# Altium PCB PCB.PcbDoc
Units mm, origin at the board's own origin, x right, y up, seen from the top; angles counter-clockwise.
Board outline 66.42 x 42.04 mm, 2 copper layers (Top Layer, Bottom Layer); 37 components, 31 nets, 242 pads, 75 vias.
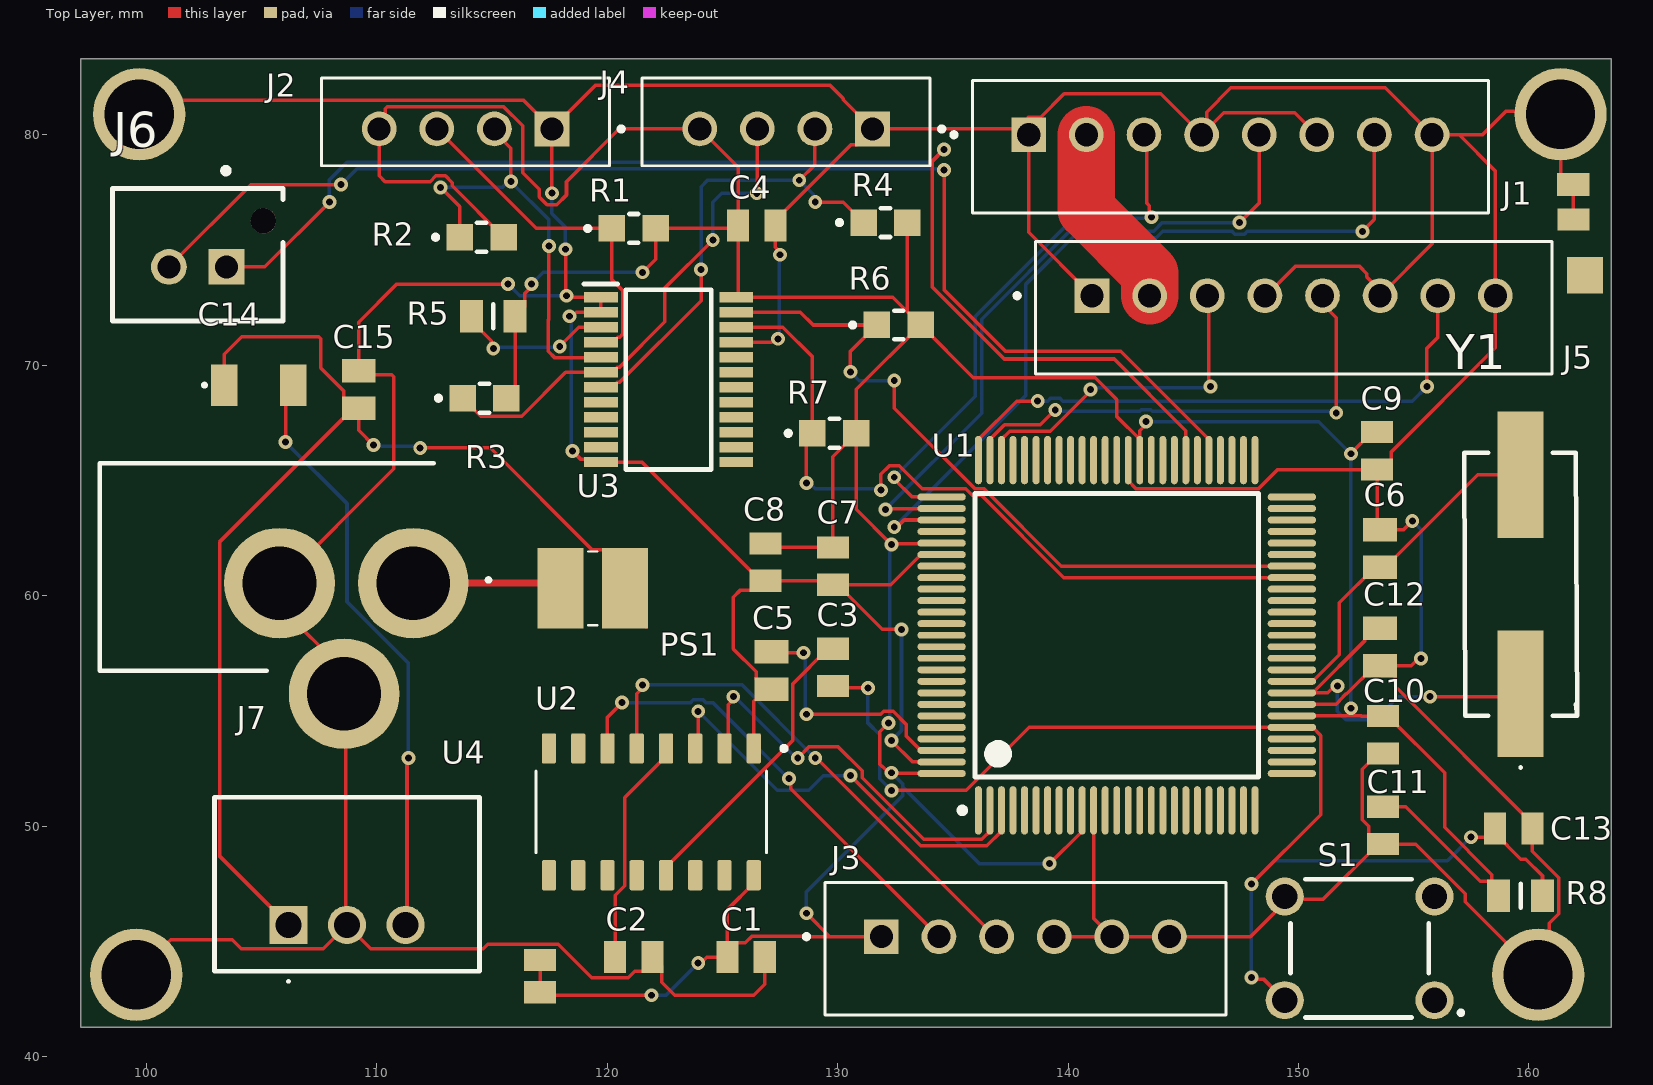
[diagram p0: Top Layer view]
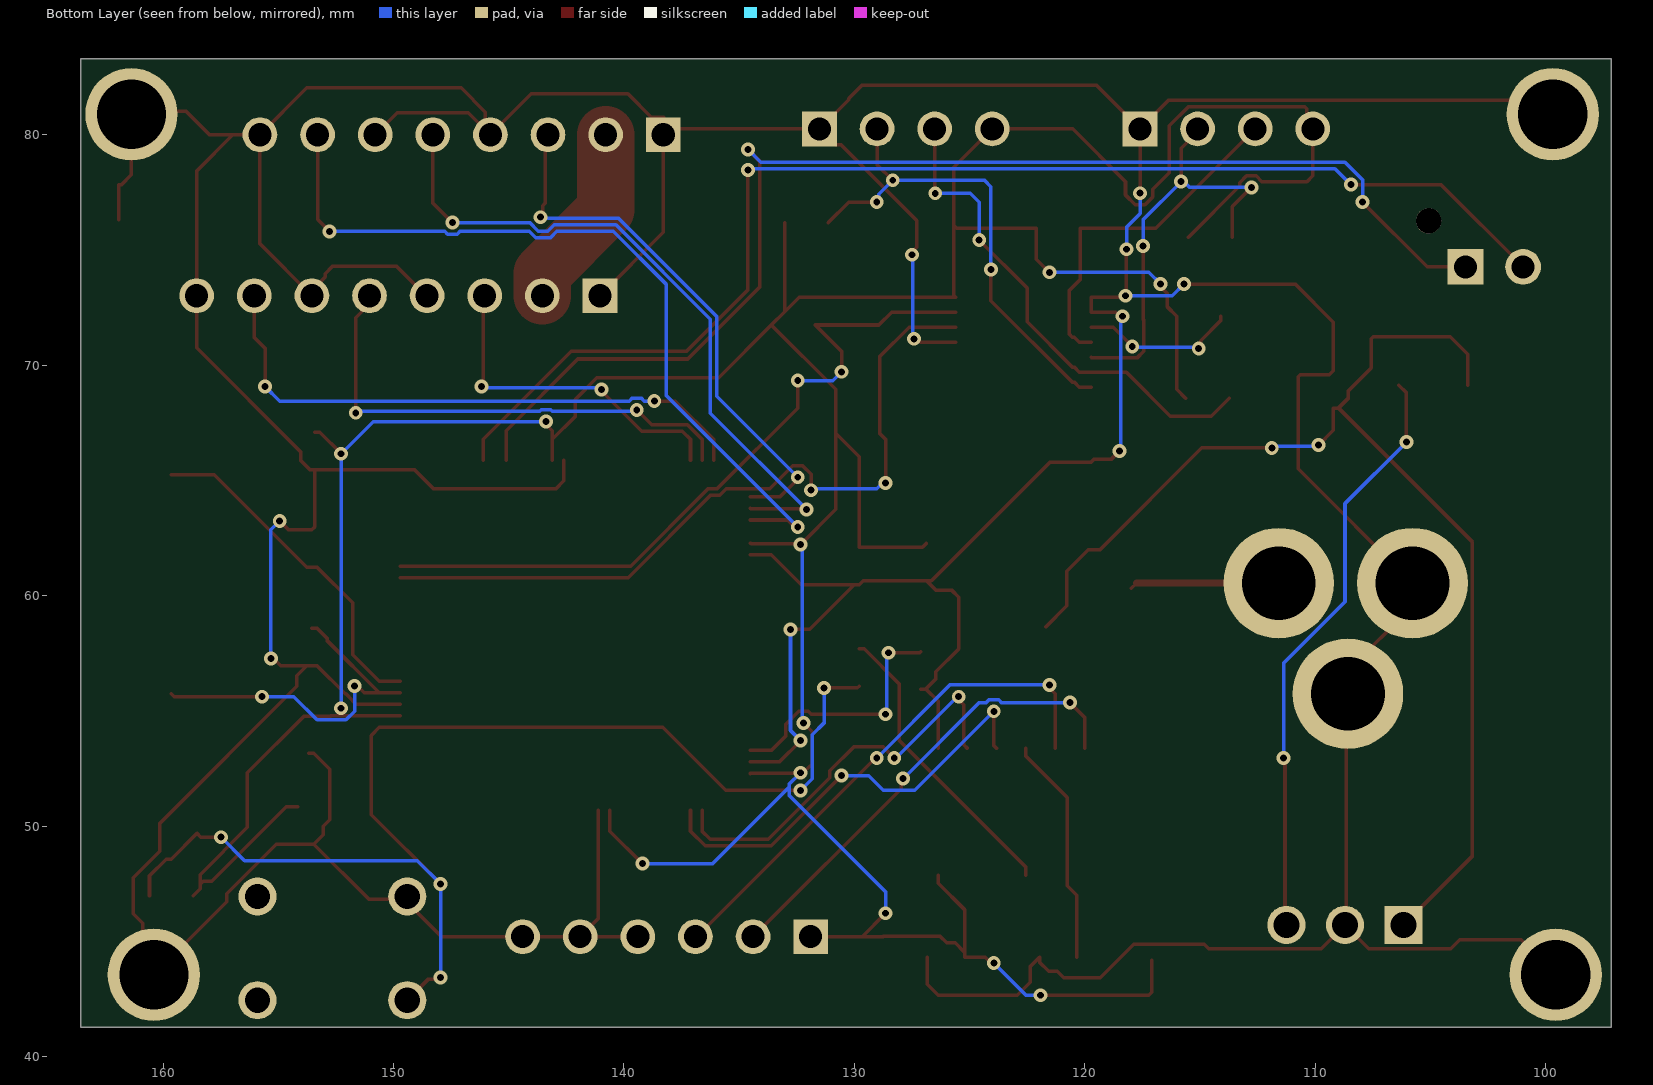
[diagram p1: Bottom Layer view, seen from below]
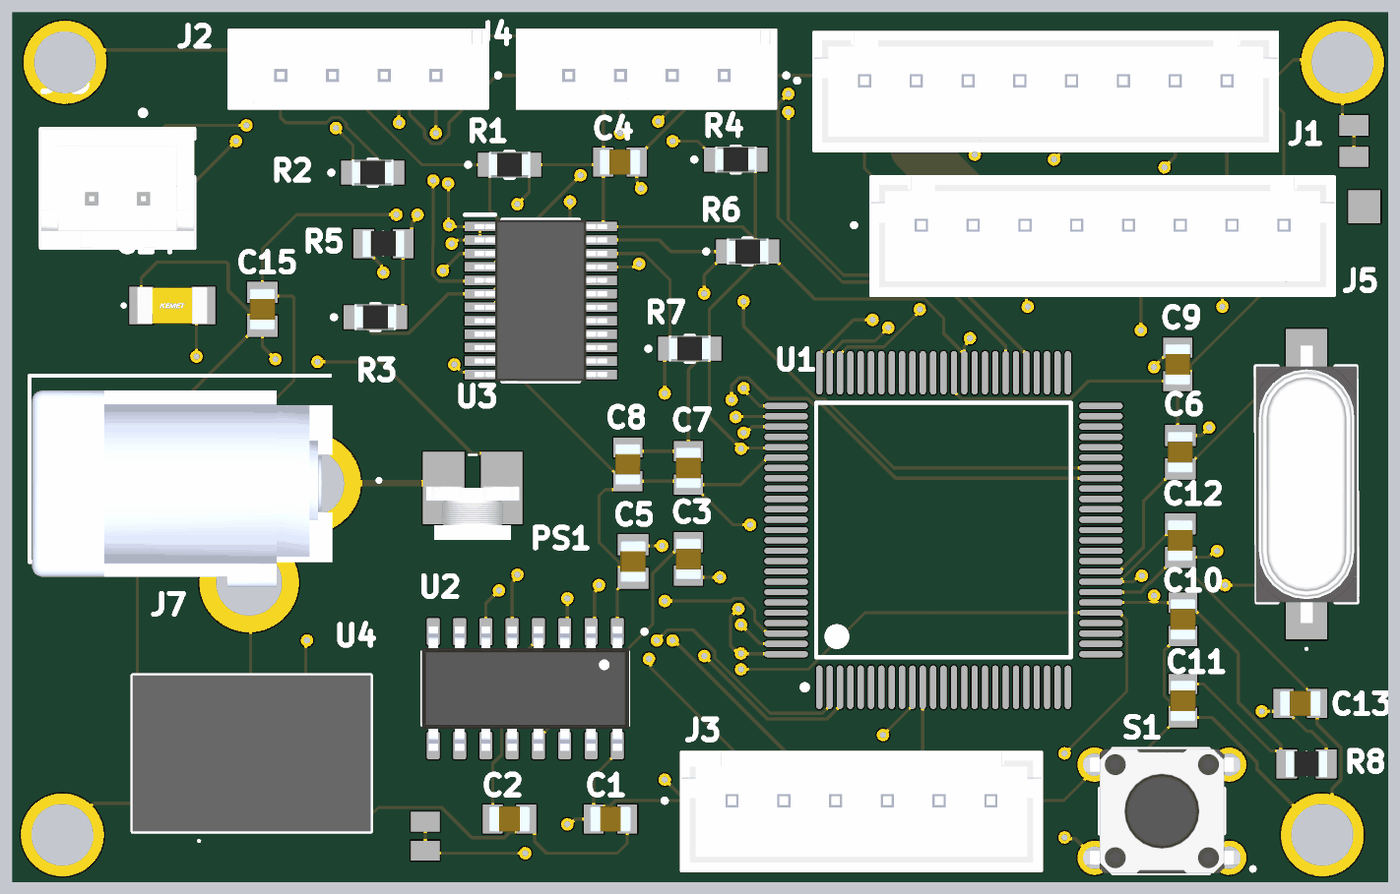
[diagram p2: 3D render of the assembled board from above, using the file's embedded part models]

## Layer stack, top to bottom
Top Solder: solder mask 0.0102, Solder Resist, Dk 3.5
Top Layer: signal copper 0.0356
Dielectric 1: dielectric 0.32, FR-4, Dk 4.8
Bottom Layer: signal copper 0.0356
Bottom Solder: solder mask 0.0102, Solder Resist, Dk 3.5

## Board outline
97.155,41.275 163.576,41.275 163.576,83.312 97.155,83.312

## Design rules (kind name [scope] priority, off if disabled: settings)
BoardOutlineClearance [All] p1: gap=0.2 ignorepadtopadclearanceinfootprint=FALSE
Clearance [All] p1: gap=0.127 ignorepadtopadclearanceinfootprint=FALSE except(0.25: Arc-Hole Track-Hole SMDPad-Hole THPad-Hole Via-Hole Fill-Hole Poly-Hole Region-Hole Text-Hole)
ComponentClearance [All] p1: gap=0.127 collisioncheckmode=3 verticalgap=0.127 showdistances=TRUE
DiffPairsRouting [All] p1: maxlimit=0.254 minlimit=0.127 mostfreqgap=0.127 toplayer_minwidth=0.127 toplayer_maxwidth=25.4 toplayer_prefwidth=0.127 bottomlayer_minwidth=0.127 bottomlayer_maxwidth=25.4 bottomlayer_prefwidth=0.127 maxuncoupledlength=12.7
Height [All] p1: minheight=0 maxheight=1816.048 prefheight=12.7
HoleSize [All] p1: absolutevalues=TRUE maxlimit=6.3 minlimit=0.3 maxpercent=80.000 minpercent=20.000
HoleToHoleClearance [All] p1: gap=0.25 allowstackedmicrovias=FALSE
MinimumAnnularRing [All] p1: minimumring=0.076
MinimumSolderMaskSliver [All] p1: minsoldermaskwidth=0
PlaneClearance [All] p1: clearance=0.127
PlaneConnect PlaneConnectPowerPads [InPadClass('PowerPads')] p1: planeconnectstyle=Direct reliefexpansion=0.508 reliefentries=4 reliefconductorwidth=0.254 reliefairgap=0.254
PlaneConnect [All] p2: pad.planeconnectstyle=Relief pad.reliefexpansion=0.3 pad.reliefentries=4 pad.reliefconductorwidth=0.127 pad.reliefairgap=0.127 via.planeconnectstyle=Direct via.reliefexpansion=0.3 via.reliefentries=4 via.reliefconductorwidth=0.127 via.reliefairgap=0.127
PolygonConnect PolygonConnectPowerPads [All vs (InPadClass('PowerPads'))] p1: connectstyle=Direct reliefconductorwidth=0.254 reliefentries=4 polygonreliefangle="90 Angle" airgapwidth=0.254
PolygonConnect [All] p2: thpad.connectstyle=Relief thpad.reliefconductorwidth=0.127 thpad.reliefentries=4 thpad.polygonreliefangle="90 Angle" thpad.airgapwidth=0.127 smdpad.connectstyle=Relief smdpad.reliefconductorwidth=0.127 smdpad.reliefentries=4 smdpad.polygonreliefangle="90 Angle" smdpad.airgapwidth=0.127 via.connectstyle=Direct via.reliefconductorwidth=0.127 via.reliefentries=4 via.polygonreliefangle="90 Angle" via.airgapwidth=0.127
RoutingVias [All] p1: holewidth=0.3 width=0.6 viastyle="Through Hole" minholewidth=0.3 minwidth=0.6 maxholewidth=0.6 maxwidth=6.6
SilkToSilkClearance [All] p1: silktosilkclearance=0
SilkToSolderMaskClearance [IsPad] p1: minsilkscreentomaskgap=0.127 clearancetoexposedcopper=TRUE
SolderMaskExpansion [All] p1: expansion=0.075 istentingtop=FALSE
Width [All] p1: maxlimit=11.43 minlimit=0.051 preferedwidth=0.152 minimp=50.000000 maximp=50.000000 favimp=50.000000
20 further rules are at their usual default settings.

## Classes and differential pairs
component class P2: C14 C15 J7 PS1 U4
component class P1: C1 C2 C3 C4 C5 C6 C7 C8 C9 C10 C11 C12 C13 J6 R1 R2 R3 R4 R5 R6 R7 R8 S1 U1 U2 U3 Y1
component class Main: J1 J2 J3 J4 J5

## Components (designator, comment, footprint, x,y, rotation, side; value= is the part's Value field where it differs from the comment)
C1 "VJ0805Y104JXXPW1BC" CAPC2012X90N 126.032,44.323 r180 top
C2 "VJ0805Y104JXXPW1BC" CAPC2012X90N 121.158,44.323 r180 top
C3 "VJ0805Y104JXXPW1BC" CAPC2012X90N 129.794,56.896 r90 top
C4 "VJ0805Y104JXXPW1BC" CAPC2012X90N 126.492,76.073 r180 top
C5 "0805ZA220JAT2A" CAPC2012X94N 127.127,56.769 r90 top
C6 "0805ZA220JAT2A" CAPC2012X94N 153.543,62.055 r90 top
C7 "VJ0805Y104JXXPW1BC" CAPC2012X90N 129.794,61.293 r90 top
C8 "VJ0805Y104JXXPW1BC" CAPC2012X90N 126.873,61.468 r90 top
C9 "VJ0805Y104JXXPW1BC" CAPC2012X90N 153.416,66.294 r90 top
C10 "VJ0805Y104JXXPW1BC" CAPC2012X90N 153.67,53.975 r90 top
C11 "VJ0805Y104JXXPW1BC" CAPC2012X90N 153.67,50.038 r90 top
C12 "0805ZA220JAT2A" CAPC2012X94N 153.543,57.785 r270 top
C13 "VJ0805Y104JXXPW1BC" CAPC2012X90N 159.337,49.911 r180 top
C14 "C1206C102GBGACTU" C1206 104.878,69.144 r0 top
C15 "0805ZA220JAT2A" CAPC2012X94N 109.22,68.961 r90 top
J1 "B8B-XH-A" JST_B8B-XH-A 147.046,79.485 r180 top
J2 "B4B-EH-A" JST_B4B-EH-A 113.859,80.264 r180 top
J3 "B6B-XH-A(LF)(SN)" JST_B6B-XH-A(LF)(SN) 138.149,44.687 r180 top
J4 "B4B-EH-A" JST_B4B-EH-A 127.769,80.264 r180 top
J5 "B8B-XH-A" JST_B8B-XH-A 149.793,72.5 r180 top
J6 "B2B-XH-AM(LF)(SN)" FP-B2B-XH-AM_LF_SN-MFG 102.235,74.803 r0 top
J7 "694106301002" 694106301002_1 97.985,56.753 r0 top
PS1 "RLS-126" RLS126 119.38,60.325 r180 top
R1 "ERA-6APB222V" ERA6AEB1020V 121.158,75.946 r0 top
R2 "ERA-6APB222V" ERA6AEB1020V 114.554,75.565 r0 top
R3 "ERA-6APB222V" ERA6AEB1020V 114.681,68.58 r0 top
R4 "ERA-6APB222V" ERA6AEB1020V 132.08,76.2 r0 top
R5 "CMP0805AFX-1002ELF" RESC2012X60N 115.062,72.136 r0 top
R6 "ERA-6APB222V" ERA6AEB1020V 132.654,71.755 r0 top
R7 "ERA-6APB222V" ERA6AEB1020V 129.86,67.056 r0 top
R8 "CMP0805AFX-1002ELF" RESC2012X60N 159.639,46.99 r180 top
S1 "B3F-1000" B3F1002 152.654,44.704 r0 top
U1 "ATmega2560-16AU" 100A_M 142.113,58.293 r90 top
U2 "CH340C" SOIC127P600X180-16N 121.92,50.629 r270 top
U3 "TCA9548APWR" SOP65P640X120-24N 122.665,69.383 r0 top
U4 "R-78CK5.0-0.5" R78CK5005 106.172,45.72 r0 top
Y1 "LFXTAL027946Reel" LFXTAL027946Reel 159.639,60.503 r90 top

## Footprints (in the part's own frame and the unit in brackets; to place one, negate y for a bottom-side part, rotate by r counter-clockwise, add the part's x,y. Pads: shape width x height; smd on the part's side, far side on the other; paste and mask are expansions set on the pad)
100A_M [mm] "Thin QFP, 100-Leads, Body 14x14mm, Pitch 0.5mm, IPC Low Density"
  oval 2.1x0.3 smd: 1(-7.6,6) 2(-7.6,5.5) 3(-7.6,5) 4(-7.6,4.5) 5(-7.6,4) 6(-7.6,3.5) 7(-7.6,3) 8(-7.6,2.5) 9(-7.6,2) 10(-7.6,1.5) 11(-7.6,1) 12(-7.6,0.5) 13(-7.6,0) 14(-7.6,-0.5) 15(-7.6,-1) 16(-7.6,-1.5) 17(-7.6,-2) 18(-7.6,-2.5) 19(-7.6,-3) 20(-7.6,-3.5) 21(-7.6,-4) 22(-7.6,-4.5) 23(-7.6,-5) 24(-7.6,-5.5) 25(-7.6,-6) 51(7.6,-6) 52(7.6,-5.5) 53(7.6,-5) 54(7.6,-4.5) 55(7.6,-4) 56(7.6,-3.5) 57(7.6,-3) 58(7.6,-2.5) 59(7.6,-2) 60(7.6,-1.5) 61(7.6,-1) 62(7.6,-0.5) 63(7.6,0) 64(7.6,0.5) 65(7.6,1) 66(7.6,1.5) 67(7.6,2) 68(7.6,2.5) 69(7.6,3) 70(7.6,3.5) 71(7.6,4) 72(7.6,4.5) 73(7.6,5) 74(7.6,5.5) 75(7.6,6)
  oval 0.3x2.1 smd: 26(-6,-7.6) 27(-5.5,-7.6) 28(-5,-7.6) 29(-4.5,-7.6) 30(-4,-7.6) 31(-3.5,-7.6) 32(-3,-7.6) 33(-2.5,-7.6) 34(-2,-7.6) 35(-1.5,-7.6) 36(-1,-7.6) 37(-0.5,-7.6) 38(0,-7.6) 39(0.5,-7.6) 40(1,-7.6) 41(1.5,-7.6) 42(2,-7.6) 43(2.5,-7.6) 44(3,-7.6) 45(3.5,-7.6) 46(4,-7.6) 47(4.5,-7.6) 48(5,-7.6) 49(5.5,-7.6) 50(6,-7.6) 76(6,7.6) 77(5.5,7.6) 78(5,7.6) 79(4.5,7.6) 80(4,7.6) 81(3.5,7.6) 82(3,7.6) 83(2.5,7.6) 84(2,7.6) 85(1.5,7.6) 86(1,7.6) 87(0.5,7.6) 88(0,7.6) 89(-0.5,7.6) 90(-1,7.6) 91(-1.5,7.6) 92(-2,7.6) 93(-2.5,7.6) 94(-3,7.6) 95(-3.5,7.6) 96(-4,7.6) 97(-4.5,7.6) 98(-5,7.6) 99(-5.5,7.6) 100(-6,7.6)
  silkscreen extent -7.72,-6.15 6.15,6.82, body extent -7,-7 7,7, height 1.6
694106301002_1 [mm]
  round 4.8 hole 3.2: 1(13.6,3.8) 2(7.8,3.8) 3(10.6,-1)
  silkscreen extent 0,0 16.93,9, body extent 0.12,-1.22 14.62,8.28, height 11.02
B3F1002 [mm]
  round 1.65 hole 1.1: 1(3.25,-2.25) 2(-3.25,-2.25) 3(3.25,2.25) 4(-3.25,2.25)
  silkscreen extent -3,-3 4.48,3, body extent -3.84,-3 3.84,3, height 4.22
C1206 [mm]
  rect 1.15x1.8 smd: 1(-1.5,0) 2(1.5,0)
  silkscreen extent -2.4,-0.05 -2.3,0.05, body extent -1.7,-0.9 1.7,0.9, height 1.75
CAPC2012X90N [mm]
  rect 0.96x1.39 smd: 1(-0.81,0) 2(0.81,0)
  body extent -1,-0.63 1,0.63, height 0.9
CAPC2012X94N [mm]
  rect 1.02x1.47 smd: 1(-0.81,0) 2(0.81,0)
  body extent -1,-0.63 1,0.63, height 0.94
ERA6AEB1020V [mm]
  rect 1.15x1.15 smd: 1(-0.95,0) 2(0.95,0)
  silkscreen extent -2.1,-0.63 0.2,0.63, body extent -1,-0.63 1,0.63, height 0.5
FP-B2B-XH-AM_LF_SN-MFG [mm]
  rect 1.55x1.55 hole 1 paste-2539.97 mask+0: 1(1.25,-0.525)
  round 1.55 hole 1 paste-2539.97 mask+0: 2(-1.25,-0.525)
  round 1.1 hole 1.1 unplated paste-2539.97 mask+0: ""(2.85,1.475)
  silkscreen extent -3.7,-2.88 3.7,3.77, body extent -3.8,-2.98 3.8,2.98, height 0.25
JST_B4B-EH-A [mm]
  rect 1.508x1.508 / inner round 1.508 / far side rect 1.508x1.508 hole 1: 1(-3.75,0)
  round 1.508 hole 1: 2(-1.25,0) 3(1.25,0) 4(3.75,0)
  silkscreen extent -6.85,-2.2 6.25,1.6, body extent -6.25,-2.2 6.25,1.6, height 6
JST_B6B-XH-A(LF)(SN) [mm]
  rect 1.508x1.508 / inner round 1.508 / far side rect 1.508x1.508 hole 1: 1(6.25,-0.525)
  round 1.508 hole 1: 2(3.75,-0.525) 3(1.25,-0.525) 4(-1.25,-0.525) 5(-3.75,-0.525) 6(-6.25,-0.525)
  silkscreen extent -8.7,-2.88 9.6,2.88, body extent -8.7,-2.88 8.7,2.88, height 7
JST_B8B-XH-A [mm]
  rect 1.508x1.508 / inner round 1.508 / far side rect 1.508x1.508 hole 1: 1(8.75,-0.525)
  round 1.508 hole 1: 2(6.25,-0.525) 3(3.75,-0.525) 4(1.25,-0.525) 5(-1.25,-0.525) 6(-3.75,-0.525) 7(-6.25,-0.525) 8(-8.75,-0.525)
  silkscreen extent -11.2,-2.88 12.1,2.88, body extent -11.2,-2.88 11.2,2.88, height 7
LFXTAL027946Reel [mm]
  rect 5.5x2 smd: 1(-4.75,0) 2(4.75,0)
  silkscreen extent -8,-2.45 5.7,2.45, body extent -6.7,-2.45 6.7,2.45, height 4.3
R78CK5005 [mm]
  rect 1.665x1.665 hole 1.11: 1(0,0)
  round 1.665 hole 1.11: 2(2.54,0) 3(5.08,0)
  silkscreen extent -3.21,-2.5 8.29,5.55, body extent -3.21,-2 8.29,5.55, height 10.8
RESC2012X60N [mm]
  rect 1x1.4 smd: 1(-0.95,0) 2(0.95,0)
  silkscreen extent 0,-0.53 0,0.53, body extent -1,-0.63 1,0.63, height 0.6
RLS126 [mm]
  rect 2x3.5 smd: 1(-1.4,0) 2(1.4,0)
  silkscreen extent -0.2,-1.6 0.2,1.6, body extent -2.25,-0.1 2.25,2.5, height 1.6
SOIC127P600X180-16N [mm]
  rrect25% 1.31x0.62 smd: 1(-2.75,4.445) 2(-2.75,3.175) 3(-2.75,1.905) 4(-2.75,0.635) 5(-2.75,-0.635) 6(-2.75,-1.905) 7(-2.75,-3.175) 8(-2.75,-4.445) 9(2.75,-4.445) 10(2.75,-3.175) 11(2.75,-1.905) 12(2.75,-0.635) 13(2.75,0.635) 14(2.75,1.905) 15(2.75,3.175) 16(2.75,4.445)
  silkscreen extent -2.85,-5 1.78,5.85, body extent -3,-5 3,5, height 1.8
SOP65P640X120-24N [mm]
  rect 1.475x0.45 smd: 1(-2.938,3.575) 2(-2.938,2.925) 3(-2.938,2.275) 4(-2.938,1.625) 5(-2.938,0.975) 6(-2.938,0.325) 7(-2.938,-0.325) 8(-2.938,-0.975) 9(-2.938,-1.625) 10(-2.938,-2.275) 11(-2.938,-2.925) 12(-2.938,-3.575) 13(2.938,-3.575) 14(2.938,-2.925) 15(2.938,-2.275) 16(2.938,-1.625) 17(2.938,-0.975) 18(2.938,-0.325) 19(2.938,0.325) 20(2.938,0.975) 21(2.938,1.625) 22(2.938,2.275) 23(2.938,2.925) 24(2.938,3.575)
  silkscreen extent -3.67,-3.9 1.85,4.15, body extent -3.2,-3.9 3.2,3.9, height 1.13

## Part data
C1 C2 C3 C4 C7 C8 C9 C10 C11 C13: "Capacitor", Manufacturer_Name=Vishay, Mouser Part Number=77-VJ0805Y104JXXPBC, Arrow Part Number=VJ0805Y104JXXPW1BC, Arrow Price/Stock=https://www.arrow.com/en/products/vj0805y104jxxpw1bc/vishay?region=nac, Datasheet Link=https://www.vishay.com/docs/28548/vjw1bcbascomseries.pdf, Height=0.9mm, Manufacturer_Part_Number=VJ0805Y104JXXPW1BC, Mouser Price/Stock=https://www.mouser.co.uk/ProductDetail/Vishay-Vitramon/VJ0805Y104JXXPW1BC?qs=9AX3phJxokWxkNM5RPFQgQ%3D%3D, Parameter 1=100nF
C5 C6 C12 C15: "Capacitor", Manufacturer_Name="Kyocera AVX", Mouser Part Number=581-0805ZA220JAT2A, Datasheet Link=https://datasheets.kyocera-avx.com/C0GNP0-Dielectric.pdf, Height=0.94mm, Manufacturer_Part_Number=0805ZA220JAT2A, Mouser Price/Stock=https://www.mouser.com/Search/Refine.aspx?Keyword=581-0805ZA220JAT2A
  C5 C6 C12: Parameter 1=22pF
  C15: Parameter 1=10uF
C14: "Capacitor", Manufacturer_Name=KEMET, Mouser Part Number=80-C1206C102GBGACTU, Datasheet Link=https://content.kemet.com/datasheets/KEM_C1009_C0G_HV_SMD.pdf, Manufacturer_Part_Number=C1206C102GBGACTU, Mouser Price/Stock=https://www.mouser.co.uk/ProductDetail/KEMET/C1206C102GBGACTU?qs=sDVxE4SYDkREww1TOS5vVw%3D%3D, Parameter 1=1nF
J1 J5: "Connector Header Through Hole 8 position 0.098 (2.50mm)", Package=None, Check_prices=https://www.snapeda.com/parts/B8B-XH-A/JST/view-part/?ref=eda, MF=JST, MP=B8B-XH-A, SnapEDA_Link=https://www.snapeda.com/parts/B8B-XH-A/JST/view-part/?ref=snap
  J1: Function="Motor Driver1"
  J5: Function="Motor Driver2"
J2 J4: "Connector Header Through Hole 4 position 0.098 (2.50mm)", Package=None, Check_prices=https://www.snapeda.com/parts/B4B-EH-A/JST/view-part/?ref=eda, MF=JST, MP=B4B-EH-A, SnapEDA_Link=https://www.snapeda.com/parts/B4B-EH-A/JST/view-part/?ref=snap
  J2: Function=TOF1
  J4: Function=TOF2
J3: "Connector Header Through Hole 6 position 0.098 (2.50mm)", Package=None, Check_prices=https://www.snapeda.com/parts/B6B-XH-A(LF)(SN)/JST+Sales+America+Inc./view-part/?ref=eda, MF="JST Sales", MP=B6B-XH-A(LF)(SN), Parameter 1=USB, SnapEDA_Link=https://www.snapeda.com/parts/B6B-XH-A(LF)(SN)/JST+Sales+America+Inc./view-part/?ref=snap
J6: library part CMP-17439-000037-1, "CONN HEADER VERT 2POS 2.5MM", Color=Green, Contact Resistance=20mR, Housing Color=White, Max Current Rating=3A, Max Operating Temperature=85°C, Max Voltage Rating (AC)=250V, Min Operating Temperature=-25°C, Connector Type="Male Pin", Contact Material=Brass, Contact Plating=Tin, Contact Type="Male Pin", Depth=5.75mm, Fastening Type=Detent, Housing Material=Polyamide, Lead Free="Lead Free", Length=7.4mm, Mount="Through Hole", Number of Positions=2, Number of Rows=1, Orientation=Straight, Packaging=Bulk, Pitch=2.5mm, Series=XH, Termination=Solder
J7: "Connector", Manufacturer_Name="Wurth Elektronik", Mouser Part Number=710-694106301002, Datasheet Link=https://datasheet.datasheetarchive.com/originals/distributors/Datasheets_SAMA/1c153bd2ba42bb51bda59ee4cd9765cd.pdf, Manufacturer_Part_Number=694106301002, Mouser Price/Stock=https://www.mouser.co.uk/ProductDetail/Wurth-Elektronik/694106301002?qs=a9WhcLg8qCwOEkcI62k5mA%3D%3D
PS1: "Power Supply", Manufacturer_Name="RECOM Power", Mouser Part Number=919-RLS-126, Arrow Part Number=RLS-126, Arrow Price/Stock=https://www.arrow.com/en/products/rls-126/recom-power?region=nac, Datasheet Link=https://www.recom-power.com/pdf/Accessories/RLS-126.pdf, Height=2.6mm, Manufacturer_Part_Number=RLS-126, Mouser Price/Stock=https://www.mouser.co.uk/ProductDetail/RECOM-Power/RLS-126?qs=gZXFycFWdAMcIZPu0z1CRg%3D%3D
R1 R2 R3 R4 R6 R7: "Resistor", Manufacturer_Name=Panasonic, Mouser Part Number=667-ERA-6APB222V, Datasheet Link=https://industrial.panasonic.com/cdbs/www-data/pdf/RDM0000/AOA0000C307.pdf, Height=0.6mm, Manufacturer_Part_Number=ERA-6APB222V, Mouser Price/Stock=https://www.mouser.co.uk/ProductDetail/Panasonic/ERA-6APB222V?qs=ob%252BdNz2%252BYEhjQl3qvaV2xg%3D%3D, Parameter 1=2.2k
R5 R8: "Resistor", Manufacturer_Name=Bourns, Mouser Part Number=652-CMP0805AFX-1002L, Arrow Part Number=CMP0805AFX-1002ELF, Arrow Price/Stock=https://www.arrow.com/en/products/cmp0805afx-1002elf/bourns?region=nac, Datasheet Link=https://ms.componentsearchengine.com/Datasheets/2/CMP0805AFX-1002ELF.pdf, Height=0.6mm, Manufacturer_Part_Number=CMP0805AFX-1002ELF, Mouser Price/Stock=https://www.mouser.co.uk/ProductDetail/Bourns/CMP0805AFX-1002ELF?qs=TiOZkKH1s2RdWJm6UffAxg%3D%3D, Parameter 1=10k
S1: "Switch", Manufacturer_Name="Omron Electronics", Mouser Part Number=653-B3F-1000, Arrow Part Number=B3F-1000, Arrow Price/Stock=https://www.arrow.com/en/products/b3f1000/omron?region=europe, Datasheet Link=https://www.omron.com/ecb/products/pdf/en-b3f.pdf, Manufacturer_Part_Number=B3F-1000, Mouser Price/Stock=https://www.mouser.co.uk/ProductDetail/Omron-Electronics/B3F-1000?qs=lK7M36XCk6JQHckSc1xIsg%3D%3D
U1: library part CMP-0095-00210-2, "8-bit AVR Microcontroller, 4.5-5.5V, 16MHz, 256KB Flash, 4KB EEPROM, 8KB SRAM, 86 GPIO pins, 100-pin TQFP, Industrial Grade (-40°C to 85°C), Pb-Free", Code_JEDEC=MS-026-AED, ComponentLink1Description="Manufacturer URL", ComponentLink1URL=http://www.atmel.com/, ComponentLink2Description="ATmega640/1280/1281/2560/2561 Datasheet", ComponentLink2URL=http://www.atmel.com/dyn/resources/prod_documents/doc2549.pdf, ComponentLink3Description="ATmega640/1280/1281/2560/2561 Summary", ComponentLink3URL=http://www.atmel.com/dyn/resources/prod_documents/2549S.pdf, DatasheetVersion="revN, May-2011", PackageDescription="100-Pin Thin Profile Plastic Quad Flat Pack (TQFP), 14 x 14 x 1.0 mm Body, 0.5 mm Pitch", PackageReference=100A, PackageVersion="revD, Oct-2010", RevisionNote="DatasheetVersion & PackageVersion updated. URLs added."
U2: "USB to serial chip CH340", Package=None, Availability="Not in stock", Check_prices=https://www.snapeda.com/parts/CH340C/WCH/view-part/?ref=eda, MF=WCH, MP=CH340C, Price=None, SnapEDA_Link=https://www.snapeda.com/parts/CH340C/WCH/view-part/?ref=snap
U3: "Integrated Circuit", Manufacturer_Name="Texas Instruments", Mouser Part Number=595-TCA9548APWR, Arrow Part Number=TCA9548APWR, Arrow Price/Stock=https://www.arrow.com/en/products/tca9548apwr/texas-instruments?region=nac, Datasheet Link=http://www.ti.com/lit/ds/symlink/tca9548a.pdf, Height=1.2mm, Manufacturer_Part_Number=TCA9548APWR, Mouser Price/Stock=https://www.mouser.co.uk/ProductDetail/Texas-Instruments/TCA9548APWR?qs=iFaFN7AS2WF%252BqSiJMbdYwQ%3D%3D
U4: "Power Supply", Manufacturer_Name="RECOM Power", Datasheet Link=https://recom-power.com/pdf/Innoline/R-78CK-0.5.pdf, Height=10.7mm, Manufacturer_Part_Number=R-78CK5.0-0.5
Y1: "Crystal or Oscillator", Manufacturer_Name=IQD, Mouser Part Number=449-LFXTAL027946REEL, Datasheet Link=https://www.mouser.in/datasheet/2/741/LFXTAL027946Reel-995509.pdf, Manufacturer_Part_Number=LFXTAL027946Reel, Mouser Price/Stock=https://www.mouser.co.uk/ProductDetail/IQD/LFXTAL027946Reel?qs=e4%2FAndAAwgL2gju6JFMFKg%3D%3D, Parameter 1=16MHz

## Free pads (board coordinates)
  round 4 hole 3: 1(99.568,43.561) 1(99.695,80.899) 1(160.401,43.561) 1(161.376,80.899)
  rect 1.4x1 smd: 3(161.925,77.851)
  rect 1.39x0.96 smd: 4(161.925,76.327) 5(117.094,44.196) 6(117.094,42.799)
  rect 1.55x1.6 smd: 8(162.433,73.914)

## Via types
v1: diameter 0.6, hole 0.3, Top Layer to Bottom Layer, 75 vias

## Nets (pads, with @x,y where several pads share a name; then routed paths per layer and width w, separated by ;. In a path a pad name is that pad's centre, name@x,y a point inside that pad or via, vN(x,y) a via of type N, cw(c..) or ccw(c..) an arc to the next point about the centre after c; other vN are vias at no path point)
+5V: C1.2 C4.2 C7.2 C8.2 C9.2 C10.2 C11.2 J2.4 J3.1 J4.4 pad.5 pad.6 R1.2 R2.2 R3.2 R4.2 R5.2 R6.2 R7.2 R8.2 U1.10 U1.31 U1.61 U1.80 U1.100 U2.16 U3.24 | length 196.2
  Top Layer w0.152: R2.2 113.279,77.79 113.279,77.932 112.984,78.227 112.568,78.227 112.318,77.978 110.363,77.978 110.109,78.232 J2.4 110.368,80.523 110.368,81.137 110.452,81.221 115.505,81.221 116.332,80.395 116.332,78.359 117.053,77.638 117.053,77.312 117.394,76.972 117.81,76.972 118.237,77.398 118.237,77.978 120.523,80.264 J4.4 125.682,78.601 C4.2 ; R3.2 116.012,68.961 R5.2 116.436,72.56 116.436,73.135 116.713,73.412 v1(116.713,73.533) ; pad.5 pad.6 117.221,42.672 v1(121.92,42.672) ; v1(121.539,74.041) 122.108,74.61 R1.2 125.555,75.946 C4.2 ; v1(123.952,44.069) 124.073,44.069 124.327,44.323 C1.2 C1.2@125.222,44.538 ; U2.16 126.365,47.534 125.222,46.391 C1.2@125.222,44.538 ; C8.2 127.048,62.103 C7.2 129.794,66.04 R7.2 ; v1(128.651,46.228) 129.667,45.212 ; J3.1 129.667,45.212 ; v1(132.207,54.483) 131.831,54.107 131.831,52.7 131.951,52.58 131.956,52.58 132.213,52.324 v1(132.334,52.324) ; v1@132.334,52.309 134.497,52.309 U1.100 ; R4.2 R6.2@133.03,72.329 ; U1.80 134.485,62.265 132.369,62.265 v1(132.334,62.23) 130.81,63.754 R7.2 ; v1(139.192,48.387) 139.206,48.387 140.613,49.794 U1.10 ; U1.61 U1.61@143.113,66.793 ; v1(143.383,67.564) 143.383,67.443 143.113,67.173 U1.61@143.113,66.793 ; U1.31 152.725,54.793 152.733,54.785 C10.2 153.885,54.785 156.34,52.33 156.34,49.958 158.391,47.907 R8.2@158.391,47.488 ; v1(152.273,66.167) 152.273,66.176 153.201,67.104 C9.2 ; C11.2@154.165,50.848 154.66,50.848 157.894,47.614 158.265,47.614 R8.2@158.391,47.488 ; R8.2 158.391,47.288 R8.2@158.391,47.488 ; C1.2@125.222,44.538 125.626,44.942 125.998,44.942 126.278,45.221 128.745,45.221 128.754,45.212 129.667,45.212 ; C4.2 125.682,73.037 U3.24 132.401,72.958 R6.2@133.03,72.329 ; R7.2 130.81,68.961 R6.2 ; R6.2@133.03,72.329 R6.2 ; R6.2 135.895,69.464 141.178,69.464 142.122,68.521 142.122,67.784 U1.61@143.113,66.793
  Bottom Layer w0.152: v1(116.713,73.533) 117.221,74.041 v1(121.539,74.041) ; v1(121.92,42.672) 122.555,42.672 v1(123.952,44.069) ; v1(128.651,46.228) 128.651,47.167 132.837,51.354 132.837,51.694 ; v1(132.207,54.483) 132.27,54.546 132.27,62.166 v1(132.334,62.23) ; v1(132.334,52.324) 132.837,51.821 132.837,51.694 ; v1(139.192,48.387) 136.144,48.387 132.837,51.694 ; v1(143.383,67.564) 150.876,67.564 v1(152.273,66.167) v1(152.273,55.123)
+12V: J1.2 J5.2 | length 8.1
  Top Layer w2.5: J1.2 140.796,76.755 143.543,74.008 J5.2
GND: C1.1 C2.1 C4.1 C5.1 C6.2 C7.1 C8.1 C9.1 C10.1 C11.1 C12.2 C13.1 C15.2 J1.1 J1.4 J1.6 J1.8 J2.1 J3.4 J3.5 J3.6 J4.1 J5.1 J5.4 J5.6 J5.8 J7.2 J7.3 pad.1 pad.3 pad.4 S1.4 U1.11 U1.32 U1.62 U1.81 U1.99 U2.1 U3.1 U3.2 U3.12 U3.21 U4.2 | length 343
  Top Layer w0.152: pad.1@99.568,43.561 99.568,43.584 101.069,45.085 103.725,45.085 104.126,44.684 107.676,44.684 U4.2 ; pad.1@99.695,80.899 100.297,81.501 116.372,81.501 J2.1 ; v1(115.697,73.533) 110.871,73.533 109.22,71.882 C15.2 109.395,69.596 110.655,69.596 110.744,69.507 110.744,65.512 J7.2 105.785,59.553 108.585,56.753 J7.3 108.648,55.689 108.648,45.783 U4.2 ; v1(117.602,77.475) 117.602,80.257 J2.1 ; v1(118.188,75.041) 118.212,75.017 118.212,73.05 v1(118.237,73.025) 118.304,72.958 U3.1 U3.2 118.657,72.308 118.485,72.136 v1(118.364,72.136) ; v1(118.491,66.294) 118.865,65.92 119.615,65.92 U3.12 121.508,65.808 126.658,60.658 C8.1 ; U3.21 127.148,71.008 127.296,71.156 v1(127.417,71.156) ; U2.1 126.365,55.422 C5.1@126.902,55.959 ; C1.1 126.842,43.149 126.365,42.672 122.936,42.672 122.372,43.236 122.372,43.919 C2.1 121.968,44.108 121.564,43.704 121.192,43.704 120.912,43.425 119.341,43.425 117.886,44.879 114.82,44.879 114.625,44.684 109.748,44.684 U4.2 ; C5.1 C5.1@126.902,55.959 ; v1(127.508,74.803) 127.508,74.924 127.302,75.13 C4.1 127.302,76.288 130.6,79.586 130.841,79.586 J4.1 ; v1(132.334,53.721) 133.262,52.793 U1.99 ; v1(132.774,58.547) 131.945,58.547 C7.1@130.009,60.483 ; U1.81 133.613,61.793 132.303,60.483 C7.1@130.009,60.483 ; J1.1@138.042,80.264 J4.1 ; J3.4 J3.5 ; J5.1 138.296,75.772 J1.1 138.265,80.041 138.265,80.772 138.811,80.772 139.827,81.788 144.018,81.788 J1.4 J1.4@146.017,80.231 ; U1.11 141.113,45.998 J3.5 ; U1.62 142.613,64.993 142.966,64.64 148.259,64.64 149.103,65.484 C9.1 ; J5.4 148.59,73.025 149.86,74.295 152.654,74.295 152.969,73.98 152.969,73.84 153.543,73.266 J5.6 155.796,75.278 J1.8 ; U1.32 151.636,55.293 151.77,55.427 151.77,55.453 152.065,55.748 152.091,55.748 153.318,56.975 C12.2 C12.2@153.768,56.975 ; J1.6 149.839,80.967 146.753,80.967 J1.4@146.017,80.231 ; C10.1 153.455,53.165 152.772,52.482 152.772,50.284 153.051,50.004 153.051,49.632 C11.1@153.455,49.228 ; v1(154.94,63.246) 154.559,62.865 C6.2 153.416,62.992 C9.1 ; v1(155.321,57.277) 155.2,57.277 154.898,56.975 C12.2@153.768,56.975 ; pad.4 pad.3 161.8,77.851 161.376,78.275 161.376,80.899 161.249,81.026 159.004,81.026 157.988,80.01 156.972,80.01 ; J2.1 119.514,82.169 129.667,82.169 130.254,81.582 130.254,81.529 J4.1 ; C8.1 129.619,60.658 C7.1 C7.1@130.009,60.483 ; C8.1 126.469,60.254 125.786,60.254 125.476,59.944 125.476,57.698 126.468,56.705 126.468,56.393 C5.1@126.902,55.959 ; J3.5 J3.6 147.916,45.212 149.531,46.827 151.054,46.827 C11.1@153.455,49.228 ; J1.4@146.017,80.231 146.017,80.993 147.066,82.042 153.764,82.042 J1.8 ; C9.1 153.631,65.484 154.035,65.888 154.035,66.26 158.543,70.769 J5.8 158.543,78.439 156.972,80.01 ; C11.1@153.455,49.228 C11.1 155.084,49.228 157.241,47.071 157.241,46.721 160.401,43.561 160.876,44.036 160.876,45.79 161.292,46.206 161.292,47.774 160.147,48.919 C13.1 160.147,50.126 154.202,56.071 154.202,56.541 C12.2@153.768,56.975 ; J1.8 156.972,80.01
  Bottom Layer w0.152: J7.3 J7.3@108.648,55.689 ; U4.2@108.648,45.783 U4.2 ; v1(115.697,73.533) 116.205,73.025 v1(118.237,73.025) ; v1(117.602,77.475) 117.602,76.595 118.188,76.009 v1(118.188,75.041) ; v1(118.364,72.136) 118.448,72.052 118.448,66.337 v1(118.491,66.294) ; v1(127.417,71.156) 127.462,71.201 127.462,74.757 v1(127.508,74.803) ; v1(132.334,53.721) 132.774,54.161 v1(132.774,58.547) ; v1(154.94,63.246) 155.321,62.865 v1(155.321,57.277)
NetC2_2: C2.2 U2.4 | length 10
  Top Layer w0.152: C2.2 120.348,47.005 120.772,47.429 120.772,51.251 122.555,53.034 U2.4
NetC3_1: C3.1 C13.2 R8.1 S1.2 U1.30 | length 55.2
  Top Layer w0.152: C3.1 129.873,56.007 v1(131.318,56.007) ; v1(132.334,51.562) 135.582,51.562 138.314,54.293 U1.30 150.613,54.293 150.966,53.94 150.966,50.509 v1(147.955,47.498) v1@147.955,47.586 ; v1(147.955,43.434) 148.015,43.374 148.484,43.374 S1.2 ; v1(157.48,49.53) 158.361,49.53 158.527,49.696 159.652,48.571 159.867,48.571 160.589,47.849 R8.1
  Bottom Layer w0.152: v1(131.318,56.007) 131.318,54.483 131.831,53.97 131.831,52.065 v1(132.334,51.562) ; v1(147.955,43.434) v1(147.955,47.498) 148.971,48.514 156.464,48.514 v1(157.48,49.53)
NetC3_2: C3.2 U2.13 | length 13
  Top Layer w0.152: U2.13 122.555,48.224 128.065,53.734 128.065,56.192 129.579,57.706 C3.2
NetC5_2: C5.2 U1.98 | length 11
  Top Layer w0.152: C5.2 127.175,57.531 v1(128.524,57.531) ; v1(128.651,54.864) 131.876,54.864 131.999,54.986 132.415,54.986 132.99,54.412 132.99,53.916 133.613,53.293 U1.98
  Bottom Layer w0.152: v1(128.524,57.531) 128.588,57.468 128.588,54.927 v1(128.651,54.864)
NetC6_1: C6.1 U1.34 Y1.2 | length 15
  Top Layer w0.152: U1.34 150.613,56.293 151.773,57.453 151.773,59.7 153.318,61.245 C6.1 153.768,61.245 157.776,65.253 Y1.2
NetC12_1: C12.1 U1.33 Y1.1 | length 15.9
  Top Layer w0.152: U1.33 U1.33@150.613,55.793 ; v1(151.688,56.084) 151.567,56.084 151.277,55.793 U1.33@150.613,55.793 ; C12.1 153.318,58.595 152.884,58.161 152.884,58.064 U1.33@150.613,55.793 ; v1(155.702,55.626) 159.512,55.626 Y1.1
  Bottom Layer w0.152: v1(151.688,56.084) 151.688,54.996 152.065,54.62 153.32,54.62 154.326,55.626 v1(155.702,55.626)
NetC14_1: C14.1 C15.1 PS1.1 U4.1 | length 53.6
  Top Layer w0.152: C14.1 103.378,70.485 104.14,71.247 107.48,71.247 107.569,71.158 107.569,69.89 108.561,68.897 108.561,68.585 C15.1@108.995,68.151 ; U4.1 103.182,48.71 103.182,62.338 C15.1@108.995,68.151 ; v1(109.855,66.548) 109.22,67.183 C15.1 C15.1@108.995,68.151 ; v1(111.887,66.421) 114.921,66.421 119.344,61.999 119.856,61.999 120.78,61.075 PS1.1 120.78,59.575 PS1.1@121.704,58.651
  Bottom Layer w0.152: v1(109.855,66.548) 109.918,66.484 111.823,66.484 v1(111.887,66.421)
NetC14_2: C14.2 U4.3 | length 25.8
  Top Layer w0.152: v1(106.045,66.675) 106.045,68.811 C14.2 ; U4.3 111.316,45.783 111.316,52.895 v1(111.379,52.959)
  Bottom Layer w0.152: v1(106.045,66.675) 108.712,64.008 108.712,59.745 111.379,57.078 v1(111.379,52.959)
NetJ1_3: J1.3 U1.76 | length 24
  Top Layer w0.152: v1(132.461,65.149) 132.461,65.066 133.234,64.293 U1.76 ; J1.3 143.424,79.882 143.424,77.038 143.531,76.932 143.531,76.519 v1(143.616,76.433)
  Bottom Layer w0.152: v1(132.461,65.149) 135.977,68.665 135.977,72.124 140.231,76.378 143.561,76.378 v1(143.616,76.433)
NetJ1_5: J1.5 U1.77 | length 29.7
  Top Layer w0.152: v1(132.08,63.754) 132.099,63.773 134.494,63.773 U1.77 ; v1(147.447,76.2) 148.296,77.049 J1.5
  Bottom Layer w0.152: v1(132.08,63.754) 136.256,67.93 136.256,72.008 140.346,76.098 143.027,76.098 143.302,75.824 143.718,75.824 144.095,76.2 v1(147.447,76.2)
NetJ1_7: J1.7 U1.78 | length 35.4
  Top Layer w0.152: v1(132.461,62.992) 132.582,62.992 132.883,63.293 U1.78 ; v1(152.781,75.819) 153.296,76.334 J1.7
  Bottom Layer w0.152: v1(132.461,62.992) 138.176,68.707 138.176,73.533 140.462,75.819 142.911,75.819 143.186,75.544 143.834,75.544 144.109,75.819 147.116,75.819 147.239,75.697 147.655,75.697 147.778,75.819 v1(152.781,75.819)
NetJ2_2: J2.2 R2.1 U3.5 | length 18.7
  Top Layer w0.152: v1(112.776,77.724) 113.604,76.896 R2.1 ; J2.2 115.109,80.133 115.824,79.418 v1(115.824,77.978) ; v1(117.475,75.184) 117.475,72.01 117.442,71.977 117.442,70.62 117.737,70.325 119.694,70.325 U3.5
  Bottom Layer w0.152: v1(112.776,77.724) 115.449,77.724 115.703,77.978 v1(115.824,77.978) 117.475,76.327 v1(117.475,75.184)
NetJ2_3: J2.3 R1.1 U3.4 | length 15.3
  Top Layer w0.152: J2.3 116.927,75.946 R1.1 120.208,73.727 120.668,73.267 120.668,71.349 120.549,71.23 120.461,71.23 120.24,71.008 U3.4
NetJ3_2: J3.2 U2.6 | length 20.5
  Top Layer w0.152: U2.6 120.015,54.737 v1(120.65,55.372) ; v1(127.889,52.07) 127.975,51.984 127.975,51.636 J3.2
  Bottom Layer w0.152: v1(120.65,55.372) 123.621,55.372 123.744,55.494 124.16,55.494 124.283,55.372 124.587,55.372 v1(127.889,52.07)
NetJ3_3: J3.3 U2.5 | length 22.7
  Top Layer w0.152: U2.5 121.285,55.759 121.539,56.013 v1(121.539,56.134) ; v1(129.032,52.959) 129.092,52.959 136.839,45.212 J3.3
  Bottom Layer w0.152: v1(121.539,56.134) 125.857,56.134 v1(129.032,52.959)
NetJ4_2: J4.2 R4.1 U3.7 | length 21.4
  Top Layer w0.152: U3.7 120.24,69.058 120.461,69.28 120.549,69.28 124.079,72.81 v1(124.079,74.168) ; v1(128.339,78.036) 129.019,78.716 J4.2 ; v1(129.032,77.089) 130.241,77.089 R4.1
  Bottom Layer w0.152: v1(124.079,74.168) 124.079,77.762 124.354,78.036 v1(128.339,78.036) 128.946,77.429 128.946,77.175 v1(129.032,77.089)
NetJ4_3: J4.3 R3.1 U3.6 | length 21.7
  Top Layer w0.152: R3.1 114.509,67.802 116.29,67.802 118.196,69.708 U3.6 120.24,69.708 120.461,69.93 120.549,69.93 122.507,71.888 122.507,73.358 v1(124.587,75.438) ; v1(126.492,77.47) 126.505,77.483 126.505,80.251 J4.3
  Bottom Layer w0.152: v1(124.587,75.438) 124.587,77.089 124.968,77.47 v1(126.492,77.47)
NetJ5_3: J5.3 U1.73 | length 15
  Top Layer w0.152: U1.73 137.113,66.793 137.466,67.146 139.232,67.146 140.97,68.884 v1(140.97,68.961) ; J5.3 146.11,72.958 146.11,69.155 v1(146.177,69.088)
  Bottom Layer w0.152: v1(140.97,68.961) 141.034,69.025 146.113,69.025 v1(146.177,69.088)
NetJ5_5: J5.5 U1.74 | length 21.9
  Top Layer w0.152: U1.74 136.613,66.793 137.246,67.426 138.8,67.426 v1(139.446,68.072) ; J5.5 151.043,72.658 151.638,72.063 v1(151.638,67.945)
  Bottom Layer w0.152: v1(139.446,68.072) 139.51,68.008 143.116,68.008 143.175,68.067 143.591,68.067 143.65,68.008 151.575,68.008 v1(151.638,67.945)
NetJ5_7: J5.7 U1.75 | length 25.5
  Top Layer w0.152: U1.75 136.113,66.793 137.773,68.453 v1(138.684,68.453) ; v1(155.575,69.088) 155.575,70.742 156.043,71.21 J5.7
  Bottom Layer w0.152: v1(138.684,68.453) 139.115,68.453 139.238,68.575 139.654,68.575 139.777,68.453 154.94,68.453 v1(155.575,69.088)
NetJ6_1: J6.1 U1.57 | length 54.9
  Top Layer w0.152: J6.1 105.139,74.278 v1(107.95,77.089) ; v1(134.62,79.375) 134.117,78.872 134.117,73.387 137.225,70.279 142.005,70.279 145.113,67.172 U1.57
  Bottom Layer w0.152: v1(107.95,77.089) 107.95,78.055 108.714,78.819 134.064,78.819 v1(134.62,79.375)
NetJ6_2: J6.2 U1.55 | length 55.7
  Top Layer w0.152: J6.2 104.558,77.851 v1(108.458,77.851) ; v1(134.62,78.486) 134.62,73.279 137.287,70.612 142.294,70.612 146.113,66.793 U1.55
  Bottom Layer w0.152: v1(108.458,77.851) 109.147,78.54 134.566,78.54 v1(134.62,78.486)
NetJ7_1: J7.1 PS1.2 | length 6.5
  Top Layer w0.152: PS1.2@117.752,60.553 PS1.2
  Top Layer w0.3: J7.1 PS1.2@117.752,60.553
NetR5_1: R5.1 U3.3 | length 6.8
  Top Layer w0.152: R5.1 114.112,71.936 114.976,71.072 114.976,70.825 v1(115.062,70.739) ; v1(117.945,70.828) 118.775,71.658 U3.3
  Bottom Layer w0.152: v1(115.062,70.739) 115.107,70.784 117.901,70.784 v1(117.945,70.828)
NetR6_1: R6.1 U1.44 U3.23 | length 32.2
  Top Layer w0.152: U3.23 128.384,72.308 128.937,71.755 R6.1 130.556,70.607 v1(130.556,69.723) ; v1(132.461,69.342) 132.461,68.145 135.967,64.64 136.362,64.64 139.709,61.293 U1.44
  Bottom Layer w0.152: v1(130.556,69.723) 130.937,69.342 v1(132.461,69.342)
NetR7_1: R7.1 U1.43 U3.22 | length 33.5
  Top Layer w0.152: U3.22 U3.22 127.625,71.659 128.91,70.374 R7.1 128.651,66.797 v1(128.651,64.897) ; v1(131.879,64.588) 131.879,65.279 132.253,65.653 132.669,65.653 133.676,64.646 135.565,64.646 135.851,64.36 136.246,64.36 139.813,60.793 U1.43
  Bottom Layer w0.152: v1(128.651,64.897) 128.772,64.897 129.026,64.643 131.824,64.643 v1(131.879,64.588)
NetU1_2: U1.2 U2.2 | length 17.7
  Top Layer w0.152: U2.2 125.251,53.535 125.251,55.28 125.476,55.505 v1(125.476,55.626) ; v1(128.27,52.959) 128.773,53.462 130.012,53.462 131.069,52.405 131.069,52.116 133.745,49.44 136.26,49.44 136.613,49.793 U1.2
  Bottom Layer w0.152: v1(125.476,55.626) 125.54,55.626 128.207,52.959 v1(128.27,52.959)
NetU1_3: U1.3 U2.3 | length 18.9
  Top Layer w0.152: U2.3 123.952,53.506 v1(123.952,54.991) ; v1(130.561,52.202) 133.602,49.16 136.48,49.16 137.113,49.793 U1.3
  Bottom Layer w0.152: v1(123.952,54.991) 127.376,51.567 128.743,51.567 129.378,52.202 v1(130.561,52.202)
pads on no net: J6. S1.1 S1.3 U1.1 U1.4 U1.5 U1.6 U1.7 U1.8 U1.9 U1.12 U1.13 U1.14 U1.15 U1.16 U1.17 U1.18 U1.19 U1.20 U1.21 U1.22 U1.23 U1.24 U1.25 U1.26 U1.27 U1.28 U1.29 U1.35 U1.36 U1.37 U1.38 U1.39 U1.40 U1.41 U1.42 U1.45 U1.46 U1.47 U1.48 U1.49 U1.50 U1.51 U1.52 U1.53 U1.54 U1.56 U1.58 U1.59 U1.60 U1.63 U1.64 U1.65 U1.66 U1.67 U1.68 U1.69 U1.70 U1.71 U1.72 U1.79 U1.82 U1.83 U1.84 U1.85 U1.86 U1.87 U1.88 U1.89 U1.90 U1.91 U1.92 U1.93 U1.94 U1.95 U1.96 U1.97 U2.7 U2.8 U2.9 U2.10 U2.11 U2.12 U2.14 U2.15 U3.8 U3.9 U3.10 U3.11 U3.13 U3.14 U3.15 U3.16 U3.17 U3.18 U3.19 U3.20